# EAGLE board bk-cir5 (EAGLE 9.1.0)
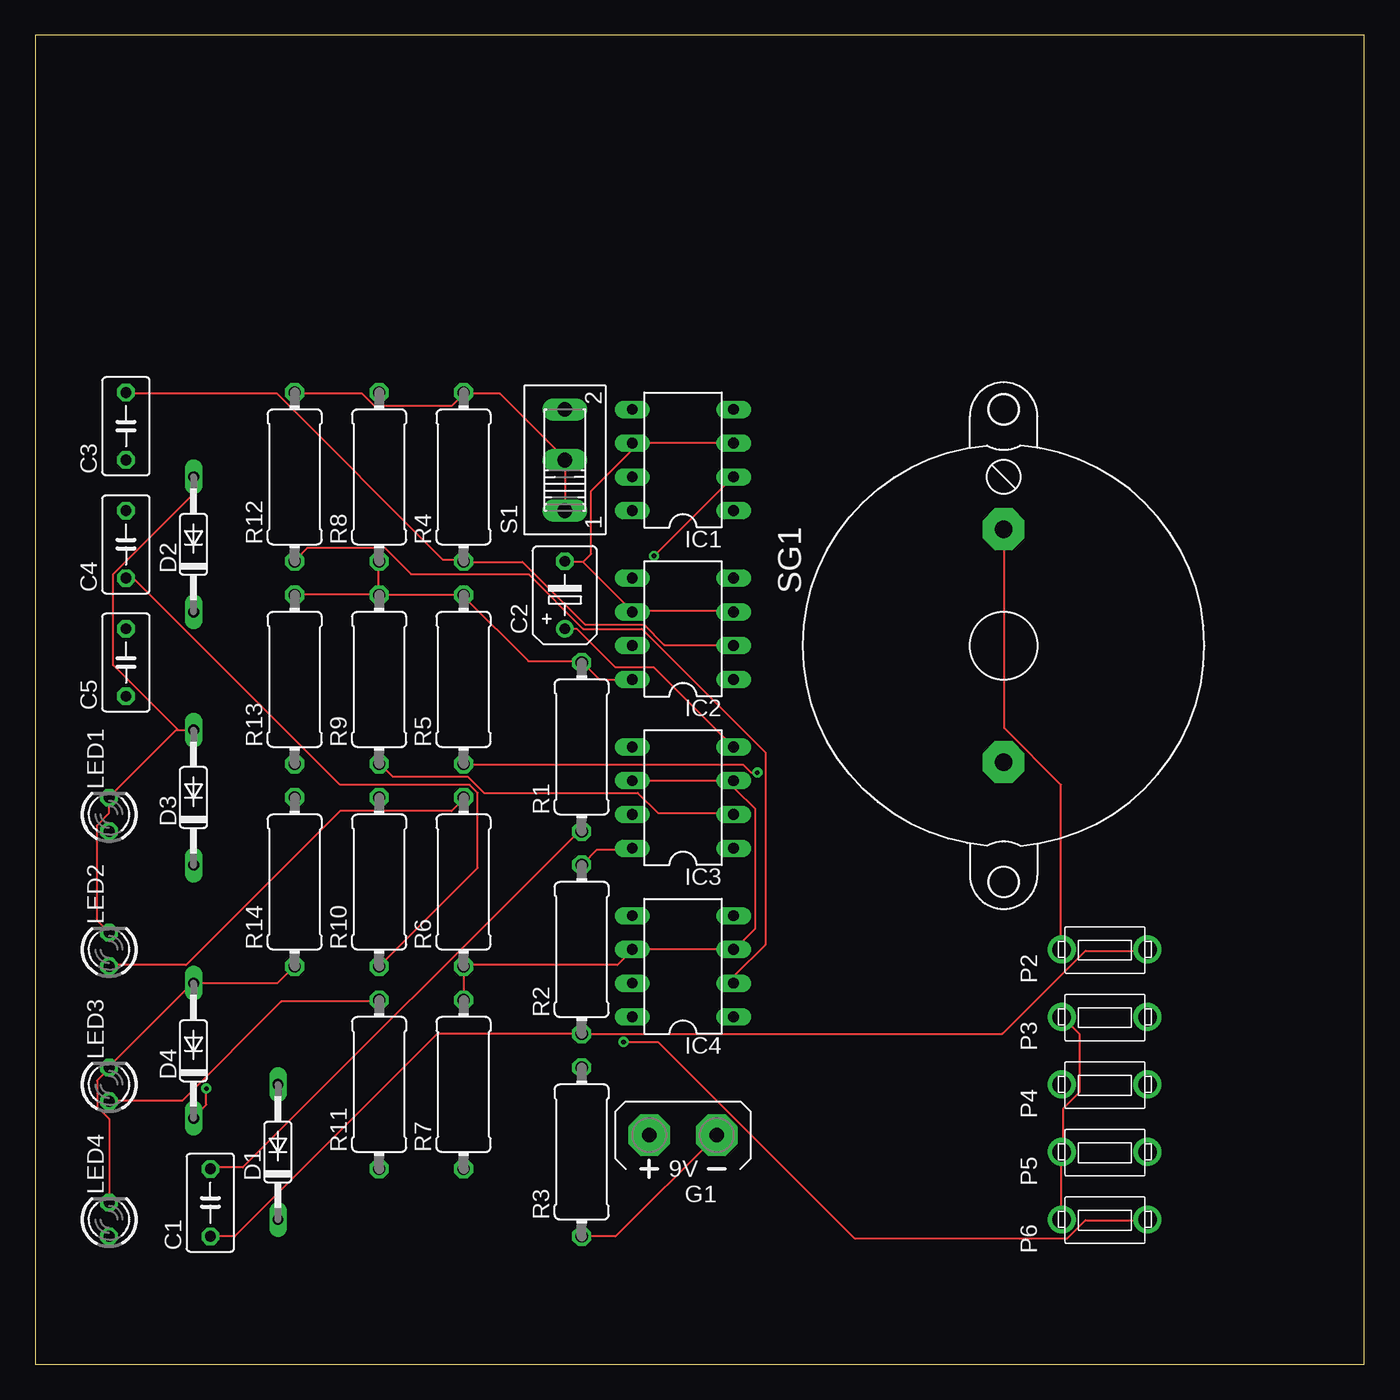
[diagram p0: board, top side]
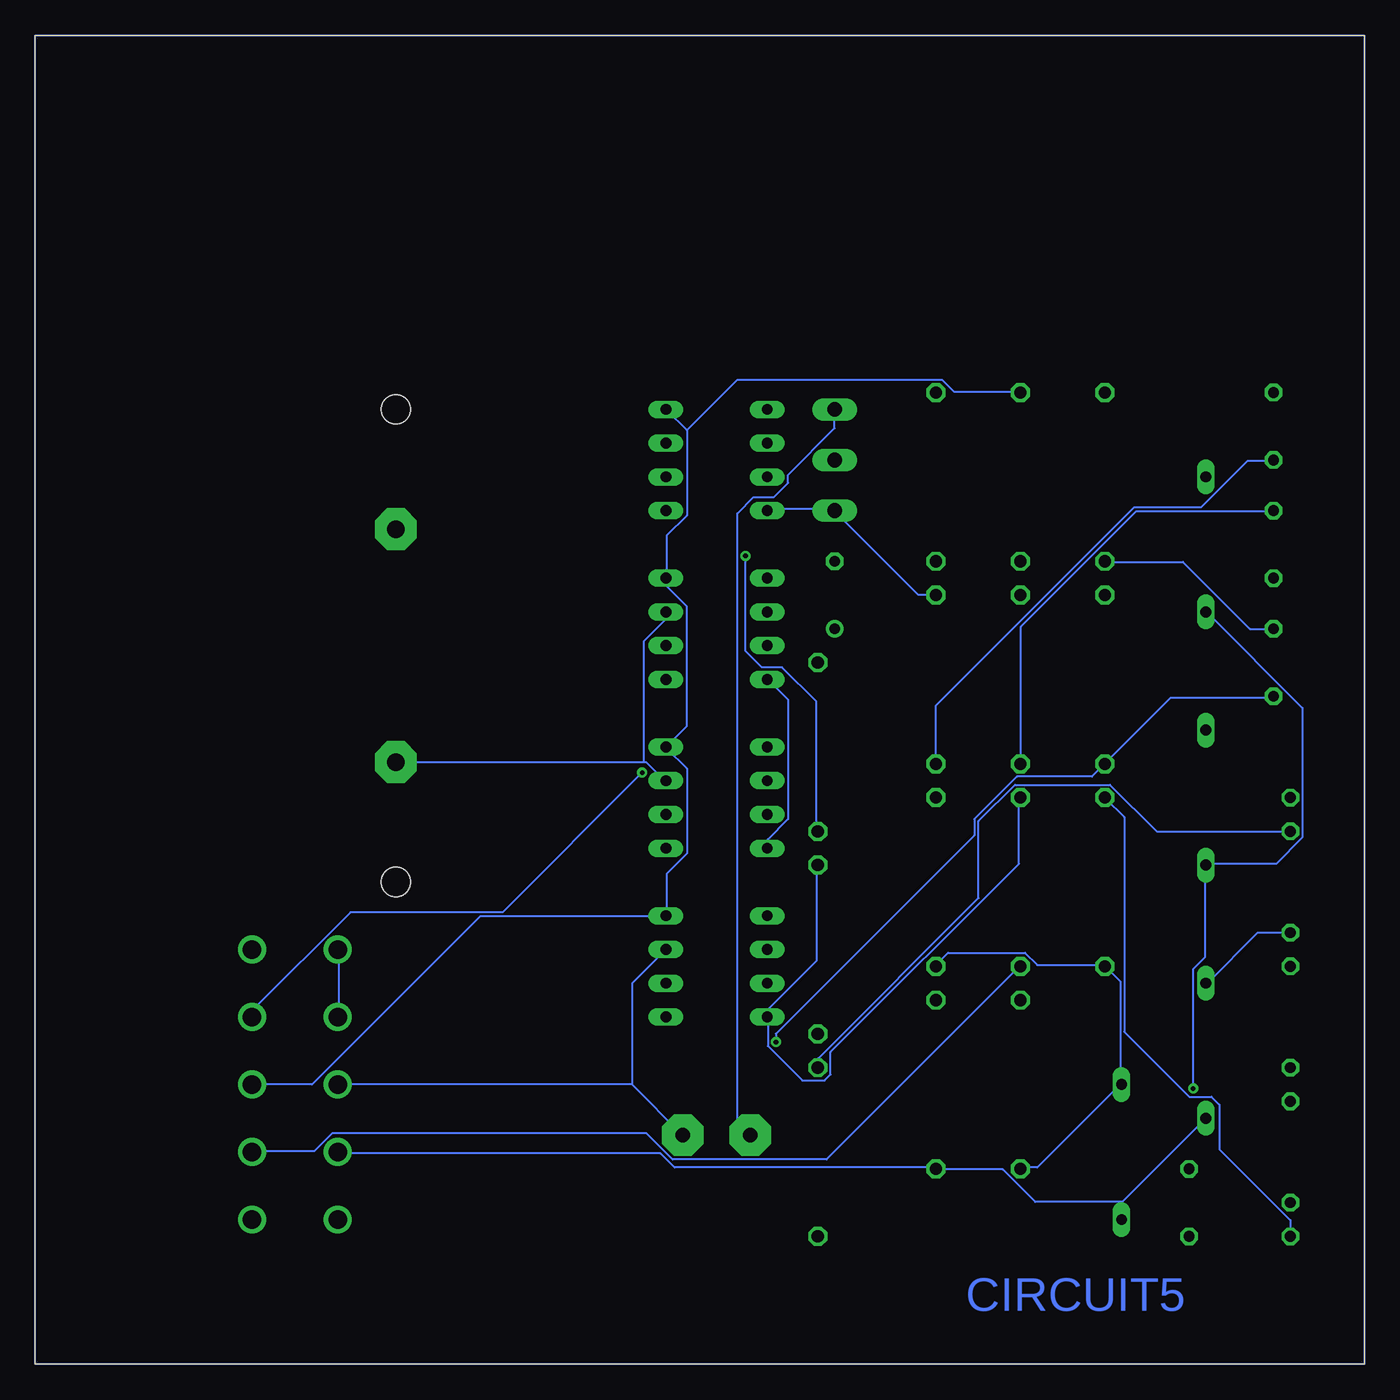
[diagram p1: board, bottom side, seen from below]

Size 100 x 100 mm. Coordinates in mm from the lower left corner, seen from the top.
Outline: 0,0 100,0 100,100 0,100 0,0
Copper layers (1*16): Top 0.035mm / dielectric 1.5mm / Bottom 0.035mm
Design rules "default": minimum track width 6mil, minimum drill 0.35mm, track to track 6mil, track to pad 6mil, pad to pad 6mil, via to via 6mil, smd to smd 6mil, copper to edge 40mil, drill to drill 6mil, minimum pad ring 10mil, minimum via ring 8mil, stop-mask expansion 4mil, vias tented up to drill 0mil, thermal gap 10mil

## Footprints (pad centres in the part's own frame; a part is rotated, then mirrored left to right if it is on the bottom)
C050-035X075 = drill 0.813 octagon: 1 -2.54,0; 2 2.54,0
B45181B = drill 0.813: + -2.54,0 | drill 0.813 octagon: - 2.54,0
DO35-10 = drill 0.813 long: A 5.08,0; C -5.08,0
AB9V = drill 1.118 pad 3.15 octagon: + 0,2.54; - 0,-2.54
DIL08 = drill 0.813 long: 1 -3.81,-3.81; 2 -1.27,-3.81; 3 1.27,-3.81; 4 3.81,-3.81; 5 3.81,3.81; 6 1.27,3.81; 7 -1.27,3.81; 8 -3.81,3.81
LED3MM = drill 0.813 octagon: A -1.27,0; K 1.27,0
FSM = drill 1.397: P$1 0,3.25; P$2 0,-3.2
0411/12 = drill 0.914 octagon: 1 -6.35,0; 2 6.35,0
255SB = drill 1.118 long: 1 -3.81,0; 2 0,0; 3 3.81,0
F/BC35 = drill 1.321 pad 3.15 octagon: + 8.763,0; - -8.763,0 | hole 2.21: 17.78,0; -17.78,0

## Placement (x,y rotation side)
C1  0.1uF  [C050-035X075]  13.18,12.16 90 top
C2  1uF  [B45181B]  39.85,57.88 90 top
C3  0.1uF  [C050-035X075]  6.83,70.58 90 top
C4  0.1uF  [C050-035X075]  6.83,61.69 90 top
C5  0.1uF  [C050-035X075]  6.83,52.8 90 top
D1  1N4148DO35-10  [DO35-10]  18.26,15.97 90 top
D2  1N4148DO35-10  [DO35-10]  11.91,61.69 90 top
D3  1N4148DO35-10  [DO35-10]  11.91,42.64 90 top
D4  1N4148DO35-10  [DO35-10]  11.91,23.59 90 top
G1  AB9V  [AB9V]  48.74,17.24 90 top
IC1  [DIL08]  48.74,68.04 90 top
IC2  [DIL08]  48.74,55.34 90 top
IC3  [DIL08]  48.74,42.64 90 top
IC4  [DIL08]  48.74,29.94 90 top
LED1  [LED3MM]  5.56,41.37 90 top
LED2  [LED3MM]  5.56,31.21 90 top
LED3  [LED3MM]  5.56,21.05 90 top
LED4  [LED3MM]  5.56,10.89 90 top
P2  FSM  [FSM]  80.49,31.21 90 top
P3  FSM  [FSM]  80.49,26.13 90 top
P4  FSM  [FSM]  80.49,21.05 90 top
P5  FSM  [FSM]  80.49,15.97 90 top
P6  FSM  [FSM]  80.49,10.89 90 top
R1  10k  [0411/12]  41.12,46.45 90 top
R2  10k  [0411/12]  41.12,31.21 90 top
R3  470  [0411/12]  41.12,15.97 90 top
R4  10k  [0411/12]  32.23,66.77 90 top
R5  10k  [0411/12]  32.23,51.53 90 top
R6  470  [0411/12]  32.23,36.29 90 top
R7  1k  [0411/12]  32.23,21.05 90 top
R8  1k  [0411/12]  25.88,66.77 90 top
R9  10k  [0411/12]  25.88,51.53 90 top
R10  10k  [0411/12]  25.88,36.29 90 top
R11  470  [0411/12]  25.88,21.05 90 top
R12  10k  [0411/12]  19.53,66.77 90 top
R13  10k  [0411/12]  19.53,51.53 90 top
R14  470  [0411/12]  19.53,36.29 90 top
S1  [255SB]  39.85,68.04 90 top
SG1  F/BC35  [F/BC35]  72.87,54.07 90 top

## Library data of the parts
C1-C5 R1-R14 = resistor
D1-D4 = diode
G1 = battery
IC1-IC4 = ic-package
LED1-LED4 = led
P2-P6 = switch-misc
S1 = switch
SG1 = buzzer; OC_FARNELL: unknown; OC_NEWARK: unknown

## Nets
N$1: C1.2 IC1.2 R1.1
N$3: LED1.A R3.2
N$4: C1.1 P2.P$2 R2.1
N$5: IC1.8 IC2.8 IC3.8 IC4.8 R1.2 R2.2 R4.2 R5.2 R8.1 R9.2 R10.2 R12.2 R13.2 S1.1 S1.2
N$6: G1.+ S1.3
N$7: C3.2 IC2.2 R4.1
N$9: LED2.A R6.2
N$10: C3.1 P3.P$2 R5.1
N$13: IC1.1
N$14: IC2.1
N$15: C2.+ IC1.4 IC2.4 IC3.4 IC4.4 P4.P$2 R8.2
N$17: C2.- D1.A D2.A D3.A D4.A G1.- IC1.3 IC1.6 IC2.3 IC2.6 IC3.3 IC3.6 IC4.3 IC4.6 LED1.K LED2.K LED3.K LED4.K P4.P$1 R3.1 R6.1 R7.2 R11.1 R14.1 SG1.-
N$20: C4.2 IC3.2 R9.1
N$21: C4.1 P5.P$2 R10.1
N$22: LED3.A R11.2
N$24: IC3.1
N$28: C5.2 IC4.2 R12.1
N$29: C5.1 P6.P$2 R13.1
N$30: LED4.A R14.2
N$31: D1.C D2.C D3.C D4.C P2.P$1 P3.P$1 P5.P$1 P6.P$1 R7.1 SG1.+
N$32: IC4.1

## Tracks (layer width: path | path; a pad name or v marks a point on that pad's centre or on a via)
N$1  (via drill 0.35)
  Top 0.152: C1.2 13.18,14.8 15.62,14.8 40.92,40.1 41.07,40.1 R1.1 | v46.56,60.83 52.5,66.77 IC1.2
  Bottom 0.152: v46.56,60.83 46.56,53.66 45.34,52.44 43.81,52.44 41.22,49.85 41.22,40.1 R1.1
N$2
  Bottom 0.152: 0,0 100,0 100,100 0,100 0,0
N$3
  Bottom 0.152: LED1.A 15.62,40.1 19.12,43.6 26.29,43.6 29.03,40.86 29.03,35.07 41.07,23.03 41.07,22.42 R3.2
N$4
  Top 0.152: C1.1 15.01,9.62 30.25,24.86 41.07,24.86 R2.1 41.22,24.86 72.77,24.86 79.02,31.11 83.59,31.11 P2.P$2
N$5
  Top 0.152: IC3.8 44.88,38.73 42.29,38.73 41.22,37.66 R2.2 | IC2.8 44.88,51.53 42.44,51.53 41.22,52.75 R1.2 41.07,52.9 37.11,52.9 32.23,57.78 R5.2 32.23,57.93 25.98,57.93 R9.2 | 25.83,57.93 25.83,60.37 R8.1 | 25.83,57.93 R9.2 | 25.83,57.93 19.58,57.93 R13.2 | 25.83,57.93 R9.2 | 32.23,73.02 34.97,73.02 39.85,68.14 S1.2 39.85,67.99 39.85,64.33 S1.1 | 32.23,73.02 R4.2 32.23,73.02 | 32.23,73.02 31.32,72.1 25.52,72.1 24.61,73.02 19.58,73.02 R12.2
  Bottom 0.152: R2.2 41.22,37.51 41.22,30.35 44.88,26.69 44.88,26.23 IC4.8 44.88,26.08 44.88,23.95 42.29,21.36 40.61,21.36 40.16,21.81 40.16,23.49 25.98,37.66 25.98,42.54 R10.2 | IC1.8 44.88,64.33 39.85,64.33 S1.1 39.85,64.18 33.6,57.93 32.23,57.93 R5.2 | IC3.8 44.88,38.88 44.88,39.49 43.35,41.01 43.35,50.01 44.88,51.53 IC2.8
N$6
  Bottom 0.152: S1.3 39.85,71.8 39.85,70.43 43.35,66.92 43.35,66.31 44.42,65.25 45.95,65.25 47.16,64.03 47.16,18.15 46.25,17.24 G1.+
N$7
  Top 0.152: IC2.2 52.5,54.12 47.32,54.12 45.79,55.65 41.37,55.65 36.65,60.37 32.23,60.37 R4.1 32.23,60.52 30.71,60.52 18.21,73.02 6.93,73.02 C3.2
N$9
  Top 0.152: LED2.A 5.56,30.04 11.35,30.04 22.93,41.62 31.32,41.62 32.23,42.54 R6.2
N$10  (via drill 0.35)
  Top 0.152: v54.33,44.52 53.87,44.52 53.26,45.13 32.23,45.13 R5.1
  Bottom 0.152: C3.1 6.93,67.99 8.76,67.99 12.27,64.48 17.3,64.48 32.23,49.55 32.23,45.28 R5.1 | v54.33,44.52 64.84,34 76.27,34 83.59,26.69 83.59,26.23 P3.P$2
N$15
  Top 0.152: C2.+ 40.76,55.34 43.66,52.44 46.56,52.44 52.5,46.5 IC3.4
  Bottom 0.152: 52.5,59.15 52.5,62.35 50.98,63.87 50.98,70.28 | 50.98,70.28 52.5,71.8 IC1.4 | 52.5,59.15 IC2.4 52.5,59.15 | 50.98,70.28 47.16,74.08 31.77,74.08 30.86,73.17 25.98,73.17 R8.2 | P4.P$2 83.59,21.05 79.17,21.05 66.52,33.7 52.65,33.7 IC4.4 52.5,33.85 52.5,36.9 50.98,38.42 50.98,44.82 52.5,46.35 IC3.4 52.5,46.5 50.98,48.02 50.98,57.02 52.5,58.54 52.5,59.15
N$17
  Top 0.152: 10.74,47.72 10.59,47.72 5.56,42.69 LED1.K 5.56,42.54 5.56,41.47 4.65,40.56 4.65,33.39 LED2.K | 10.74,47.72 11.81,47.72 D3.A | 10.74,47.72 5.87,52.6 5.87,59.45 11.81,65.4 11.81,66.77 D2.A | LED4.K 5.56,12.21 5.56,18.46 4.65,19.37 4.65,21.36 5.56,22.27 LED3.K 5.56,22.42 11.81,28.67 D4.A 11.96,28.67 18.21,28.67 19.43,29.89 R14.1 | G1.- 43.66,9.62 41.22,9.62 R3.1 | IC1.3 52.5,69.36 45.03,69.36 IC1.6 44.88,69.21 44.88,68.75 41.83,65.7 41.83,60.98 41.22,60.37 | IC2.3 52.5,56.71 45.03,56.71 IC2.6 44.88,56.71 41.22,60.37 | 41.22,60.37 39.85,60.37 C2.- | IC3.6 45.03,43.91 52.5,43.91 IC3.3 52.65,43.91 52.65,43.3 54.18,41.78 54.18,32.78 52.65,31.26 IC4.3 52.5,31.26 45.03,31.26 IC4.6 44.88,31.11 43.81,30.04 32.23,30.04 R6.1 32.23,29.89 32.23,27.45 R7.2
  Bottom 0.152: 18.36,21.05 18.36,28.82 19.43,29.89 R14.1 19.58,30.04 24.61,30.04 25.52,30.96 31.32,30.96 32.23,30.04 R6.1 | 18.36,21.05 D1.A 18.36,21.05 | LED2.K 8,32.48 11.81,28.67 D4.A | 18.36,21.05 24.61,14.8 25.83,14.8 R11.1 | 55.09,21.05 77.19,21.05 P4.P$1 | G1.- 55.09,21.05 | 54.18,45.28 54.02,45.28 52.65,43.91 IC3.3 | 54.18,45.28 72.77,45.28 SG1.- | 54.18,45.28 54.18,54.43 52.65,55.95 52.65,56.56 IC2.3 | 55.09,21.05 55.09,28.67 52.65,31.11 IC4.3
N$20
  Top 0.152: IC3.2 52.5,41.47 46.86,41.47 45.34,43 33.75,43 32.53,44.22 26.9,44.22 25.98,45.13 R9.1
  Bottom 0.152: C4.2 6.93,64.18 17.14,64.18 25.83,55.49 25.83,45.28 R9.1
N$21
  Top 0.152: C4.1 6.93,59.15 7.39,59.15 22.93,43.6 32.69,43.6 33.3,43 33.3,37.36 25.98,30.04 R10.1
  Bottom 0.152: P5.P$2 83.59,16.02 79.02,16.02 77.64,17.39 54.02,17.39 52.04,15.41 40.46,15.41 25.98,29.89 R10.1
N$22
  Top 0.152: LED3.A 5.56,19.83 11.05,19.83 18.51,27.3 25.83,27.3 R11.2
N$28
  Top 0.152: IC4.2 52.65,28.67 52.65,29.28 54.94,31.57 54.94,46.04 45.64,55.34 41.22,55.34 37.11,59.45 28.27,59.45 26.29,61.44 20.5,61.44 19.58,60.52 R12.1
  Bottom 0.152: C5.2 6.93,55.34 8.61,55.34 13.64,60.37 19.43,60.37 R12.1
N$29  (via drill 0.35)
  Top 0.152: v44.27,24.25 46.86,24.25 61.64,9.47 77.64,9.47 79.02,10.84 83.59,10.84 P6.P$2
  Bottom 0.152: C5.1 6.93,50.16 14.55,50.16 19.43,45.28 R13.1 19.58,45.13 20.5,44.22 26.13,44.22 29.33,41.01 29.33,39.8 44.27,24.86 v44.27,24.25
N$30
  Bottom 0.152: LED4.A 5.56,10.84 10.89,16.17 10.89,19.53 11.5,20.14 13.18,20.14 18.06,25.01 18.06,41.17 19.43,42.54 R14.2
N$31  (via drill 0.35)
  Top 0.152: P6.P$1 77.19,10.99 77.19,15.87 P5.P$1 77.34,16.02 77.34,19.22 78.56,20.44 78.56,24.86 77.34,26.08 P3.P$1 | SG1.+ 72.92,62.81 72.92,47.87 77.19,43.6 77.19,31.26 P2.P$1 | v12.88,20.75 12.88,19.53 11.96,18.61 D4.C
  Bottom 0.152: P3.P$1 77.19,26.23 77.19,31.11 P2.P$1 | D2.C 11.81,56.56 4.65,49.4 4.65,39.64 6.63,37.66 11.81,37.66 D3.C 11.96,37.51 11.96,30.65 12.88,29.74 v12.88,20.75 | 18.21,12.21 18.21,10.99 D1.C | 18.21,12.21 11.96,18.46 D4.C | 18.21,12.21 24.76,12.21 27.2,14.65 32.23,14.65 R7.1 32.23,14.8 51.89,14.8 52.96,15.87 77.19,15.87 P5.P$1

## Text on the board
Bottom: CIRCUIT5